# EAGLE board PCB power glider v22 (EAGLE 9.7.0)
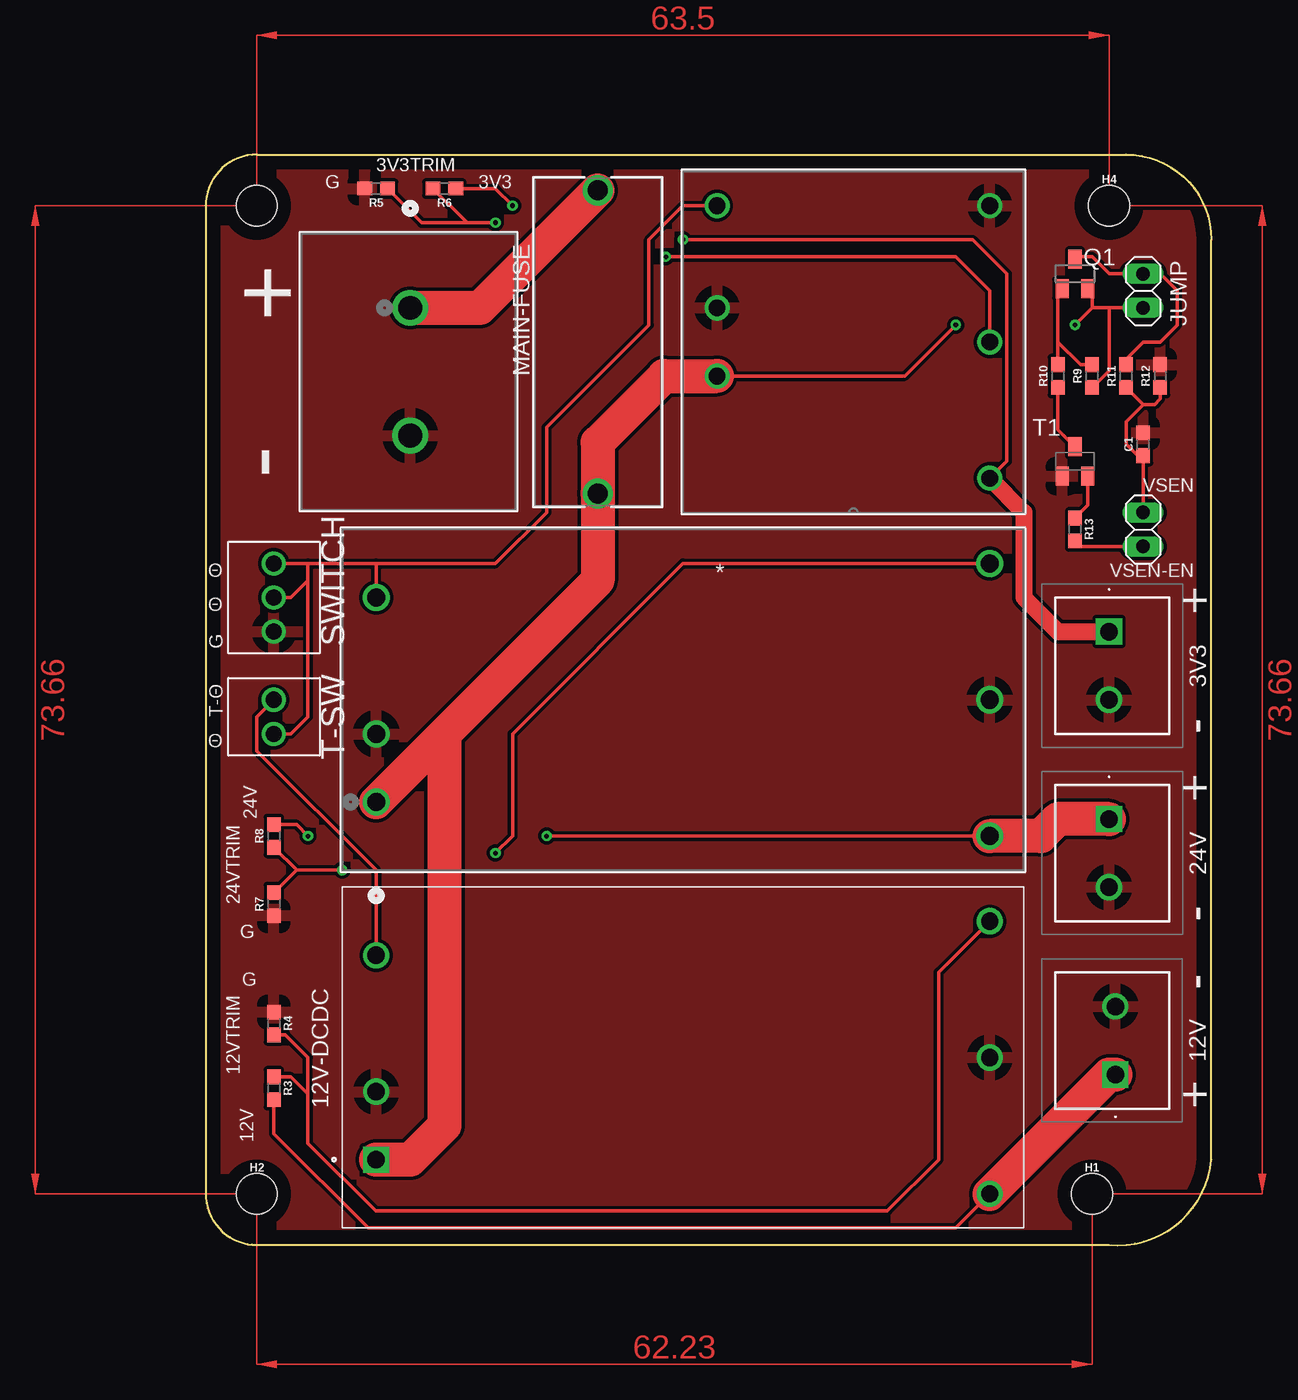
[diagram p0: board, top side]
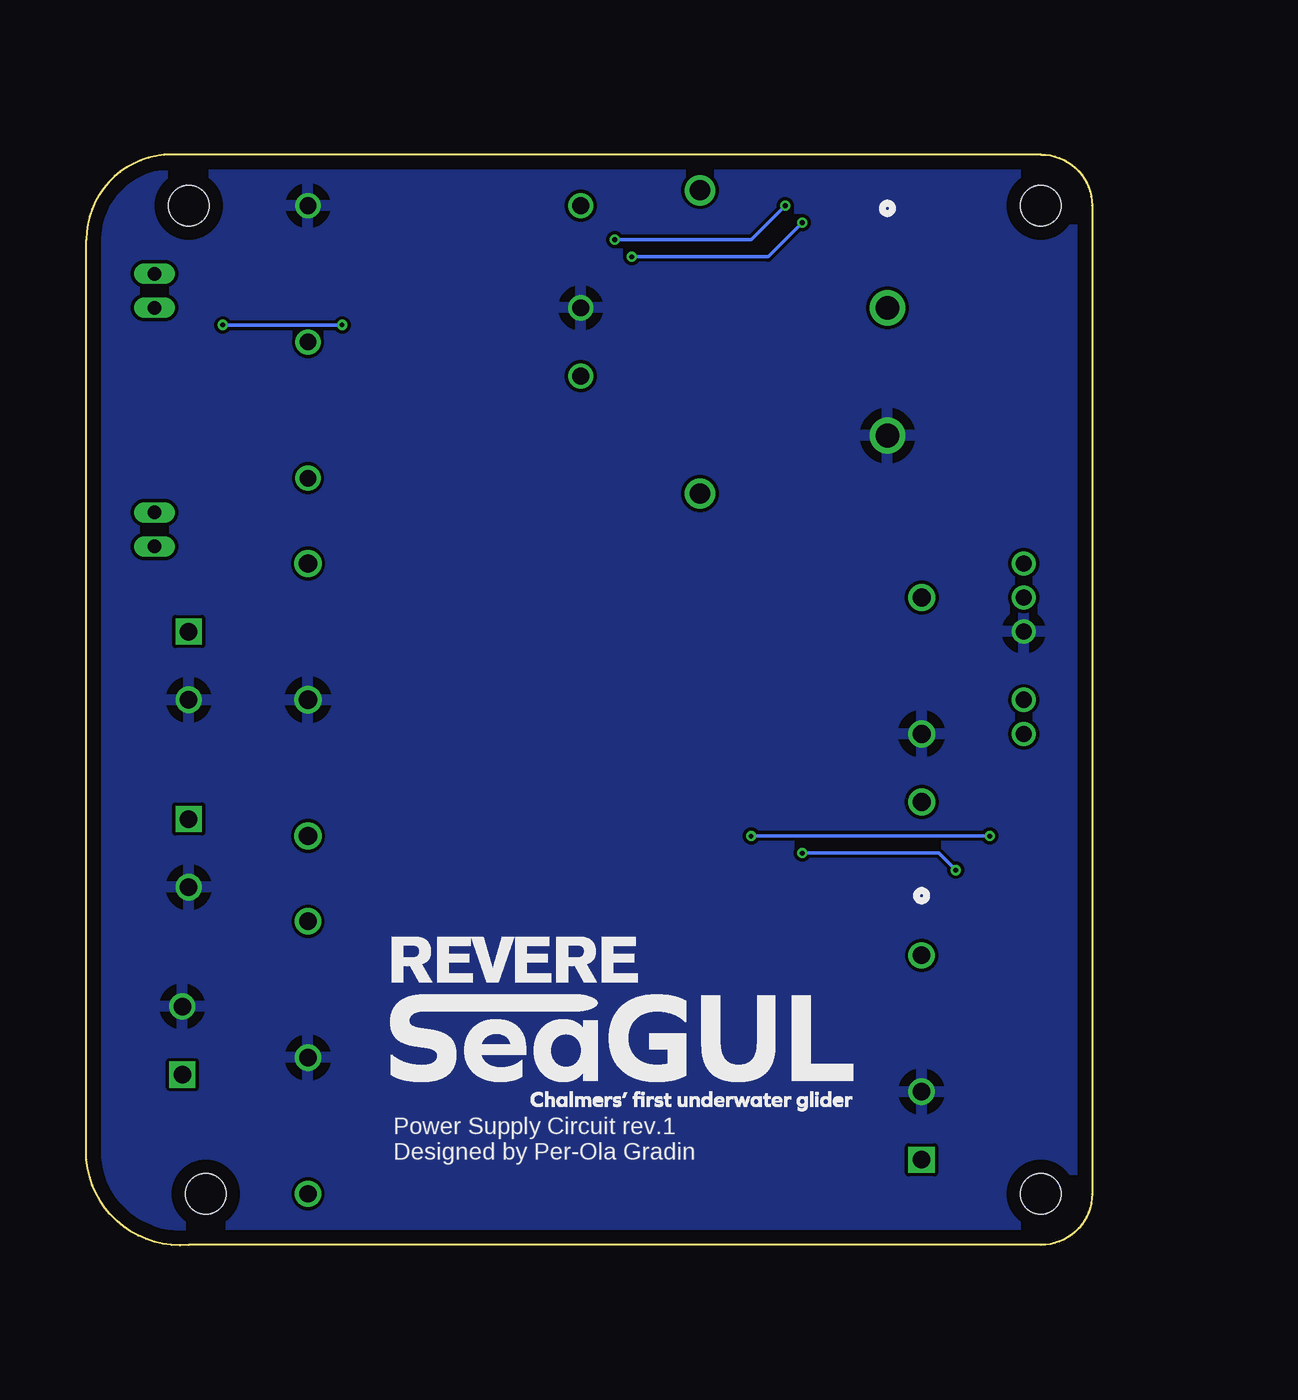
[diagram p1: board, bottom side, seen from below]

Size 74.93 x 81.31 mm. Coordinates in mm from the lower left corner, seen from the top.
Outline: 3.81,0.03 67.31,0.03 arc90 74.93,6.38 74.93,74.96 arc90 68.58,81.31 3.81,81.31 arc90 0,77.5 0,3.84 arc90 3.81,0.03
Copper layers (1*16): Top 0.035mm / dielectric 1.5mm / Bottom 0.035mm
Design rules "default *": minimum track width 6mil, minimum drill 0.35mm, track to track 6mil, track to pad 6mil, pad to pad 6mil, via to via 0.5mm, smd to smd 6mil, copper to edge 40mil, drill to drill 6mil, minimum pad ring 10mil, minimum via ring 8mil, stop-mask expansion 4mil, vias tented up to drill 0mil, thermal gap 0.75mm

## Footprints (pad centres in the part's own frame; a part is rotated, then mirrored left to right if it is on the bottom)
CTBP05082 = drill 1.3 pad 1.95 square: 1 0,0 | drill 1.3 pad 1.95: 2 5.08,0
THN_20WIR_SINGLE_TRP = drill 1.245 pad 1.753: 1 0,0; 2 0,-5.08; 3 0,-12.7; 4 -20.32,7.62; 5 -20.32,-2.54; 6 -20.32,-12.7
CONV_TEN_60-4812WIN = drill 1.3 pad 1.95 square: 1 -22.86,-7.62 | drill 1.3 pad 1.95: 2 -22.86,-2.54; 3 -22.86,7.62; 4 22.86,-10.16; 5 22.86,0; 6 22.86,10.16
TEN_60WIN_TRP = drill 1.346 pad 1.854: 1 0,0; 2 5.08,0; 3 15.24,0; 4 -2.54,-45.72; 5 7.62,-45.72; 6 17.78,-45.72
0603 = smd 1.1 x 1: 1 -0.85,0; 2 0.85,0
STAND-OFF-TIGHT = hole 3.048: 0,0
1X02 = drill 1.016 long: 1 -1.27,0; 2 1.27,0
696108003002 = drill 1.5: 1 -11.3,0; 2 11.3,0
SOT23 = smd 1 x 1.4: 1 -0.95,-1.1; 2 0.95,-1.1; 3 0,1.1
TERMBLK_254-3N = drill 1.2: 1 0,0; 2 2.54,0; 3 5.08,0
SOT23-EBC = smd 1 x 1.4: B 0.95,-1.1; C 0,1.1; E -0.95,-1.1
TERMBLK_254-2N = drill 1.2: 1 0,0; 2 2.54,0
CONN2_1437664-4_TEC = drill 1.778 pad 2.286: 1 0,0; 2 9.525,0

## Placement (x,y rotation side)
3V3  CTBP0508_2  [CTBP05082]  67.31,45.75 270 top
3V3-DCDC  THN_20-4810WIRTHN_20WIR_SINGLE_TRP  [THN_20WIR_SINGLE_TRP]  38.1,64.8 180 top
12V  CTBP0508_2  [CTBP05082]  67.78,12.73 90 top
12V-DCDC  TEN_60-4812WIN  [CONV_TEN_60-4812WIN]  35.56,14 0 top
24V  CTBP0508_2  [CTBP05082]  67.31,31.78 270 top
24V-DCDC  TEN_60-4815WINTEN_60WIN_TRP  [TEN_60WIN_TRP]  12.7,33.05 90 top
C1  100nF  [0603]  69.85,59.72 90 top
H1  STAND-OFFTIGHT  [STAND-OFF-TIGHT]  66.04,3.84 0 top
H2  STAND-OFFTIGHT  [STAND-OFF-TIGHT]  3.81,3.84 0 top
H3  STAND-OFFTIGHT  [STAND-OFF-TIGHT]  3.81,77.5 0 top
H4  STAND-OFFTIGHT  [STAND-OFF-TIGHT]  67.31,77.5 0 top
JUMP  PINHD-1X2  [1X02]  69.85,71.15 90 top
MAIN-FUSE  696108003002  [696108003002]  29.21,67.34 90 top
Q1  PMOSFET  [SOT23]  64.77,72.42 0 top
R3  [0603]  5.08,11.7 270 top
R4  [0603]  5.08,16.54 270 top
R5  [0603]  12.7,78.77 180 top
R6  [0603]  17.78,78.77 180 top
R7  [0603]  5.08,25.43 90 top
R8  [0603]  5.08,30.51 270 top
R9  15kOhm  [0603]  66.04,64.8 270 top
R10  36kOhm  [0603]  63.5,64.8 90 top
R11  110kOhm  [0603]  68.58,64.8 90 top
R12  10kOhm  [0603]  71.12,64.8 270 top
R13  10kOhm  [0603]  64.77,53.37 270 top
SWITCH  2828XX-3282834-3  [TERMBLK_254-3N]  5.08,50.83 270 top
T1  [SOT23-EBC]  64.77,58.45 0 top
T-SW  2828XX-2282834-2  [TERMBLK_254-2N]  5.08,40.67 270 top
VBAT  NC6-P107-02CONN2_1437664-4_TEC  [CONN2_1437664-4_TEC]  15.24,69.88 270 top
VSEN  PINHD-1X2  [1X02]  69.85,53.37 90 top

## Library data of the parts
3V3 12V 24V = CTBP0508_2; DESCRIPTION: Conn Terminal Block F 2 POS 5.08mm Solder ST Thru-Hole 8A; HEIGHT: 10.2mm; MANUFACTURER_NAME: CAMDENBOSS; MANUFACTURER_PART_NUMBER: CTBP0508/2
3V3-DCDC = TRACO_THN 20-4810WIR_Library; COPYRIGHT: Copyright (C) 2024 Ultra Librarian. All rights reserved.; MANUFACTURER_PART_NUMBER: THN 20-4810WIR; MFR_NAME: Traco Power
12V-DCDC = TEN_60-4812WIN; AVAILABILITY: In Stock; CHECK_PRICES: https://www.snapeda.com/parts/TEN%2060-4812WIN/Traco+Power/view-part/?ref=eda; DESCRIPTION: 60 Watt DC/DC converter, industrial, 4:1 input, encapsulated, 2 x 1 metal package; MF: Traco Power; MP: TEN 60-4812WIN; PACKAGE: 2&quot; X 1&quot; Traco Power; PRICE: None; PURCHASE-URL: https://www.snapeda.com/api/url_track_click_mouser/?unipart_id=2783815&manufacturer=Traco Power&part_name=TEN 60-4812WIN&search_term=ten 60-4812win; SNAPEDA_LINK: https://www.snapeda.com/parts/TEN%2060-4812WIN/Traco+Power/view-part/?ref=snap
24V-DCDC = TRACO_TEN-60-4815WIN_Library; COPYRIGHT: Copyright (C) 2024 Ultra Librarian. All rights reserved.; MANUFACTURER_PART_NUMBER: TEN 60-4815WIN; MFR_NAME: Traco Power
C1 = SparkFun-Capacitors
H1-H4 = SparkFun-Hardware
JUMP VSEN = Connector; CATEGORY: Headers; DESCRIPTION: Header, Straight, 2 Position; MANUFACTURER: Generic; MPN: Generic; OPERATING_TEMPERATURE: Generic; PART_STATUS: Active; PITCH: 0.100" (2.54mm); ROHS_COMPLIANCE: Generic; SERIES: Generic; SUB-CATEGORY: Headers, Male Pins; TYPE: Board to Board or Cable, Unshrouded, Through Hole, Straight
MAIN-FUSE = Wurth_Connectors_WR-FSH; DATASHEET-URL: https://www.we-online.com/catalog/datasheet/696108003002.pdf; IR-UL: 20A; IR-VDE: 6.3A; MATES: 696122003001; PART-NUMBER: 696108003002
Q1 = Transistor; CATEGORY: Transistor; SUB-CATEGORY: MOSFET; TYPE: P-Channel
R3-R13 = SparkFun-Resistors
SWITCH = Connector; CATEGORY: Fixed Terminal Blocks; DESCRIPTION: Fixed Terminal Blocks 3P TERMINAL BLOCK; MANUFACTURER: TE Connectivity AMP Connectors; MPN: 282834-3; OPERATING_TEMPERATURE: -40°C ~ 105°C; PART_STATUS: Active; PITCH: 0.100" (2.54mm); ROHS_COMPLIANCE: RoHS Compliant; SERIES: Buchanan; SUBCATEGORY: Terminal Blocks; TYPE: Through Hole; Screw - Rising Cage Clamp; Side wire entry, Horizontal with Board
T1 = transistor
T-SW = Connector; CATEGORY: Fixed Terminal Blocks; DESCRIPTION: Fixed Terminal Blocks 2P SIDE ENTRY 2.54mm; MANUFACTURER: TE Connectivity AMP Connectors; MPN: 282834-2; OPERATING_TEMPERATURE: -40°C ~ 105°C; PART_STATUS: Active; PITCH: 0.100" (2.54mm); ROHS_COMPLIANCE: RoHS Compliant; SERIES: Buchanan; SUBCATEGORY: Terminal Blocks; TYPE: Through Hole; Screw - Rising Cage Clamp; Side wire entry, Horizontal with Board
VBAT = 2pos_barrierstrip_Library; COPYRIGHT: Copyright (C) 2024 Ultra Librarian. All rights reserved.; MANUFACTURER_PART_NUMBER: NC6-P107-02; MFR_NAME: TE Connectivity

## Nets
3.3V: 3V3-DCDC.4 3V3.1 R6.1
3V3TRIM: 3V3-DCDC.5 R5.1 R6.2
12V: 12V-DCDC.4 12V.1 R3.2
12VTRIM: 12V-DCDC.6 R3.1 R4.2
24VTRIM: 24V-DCDC.6 R7.2 R8.2
+24V: 24V-DCDC.4 24V.1 R8.1
DRAIN: JUMP.2 Q1.3 R11.2
GATE: Q1.1 R9.1 R10.2
GND [New Class]: 3V3-DCDC.2 3V3-DCDC.6 3V3.2 12V-DCDC.2 12V-DCDC.5 12V.2 24V-DCDC.2 24V-DCDC.5 24V.2 C1.2 R4.1 R5.2 R7.1 R12.1 SWITCH.3 T1.E VBAT.2
N$3: MAIN-FUSE.2 VBAT.1
N$11: R10.1 T1.C
N$12: R13.1 T1.B
ON/OFF: 3V3-DCDC.3 24V-DCDC.3 SWITCH.1 SWITCH.2 T-SW.2
THRUSTER-ON/OFF: 12V-DCDC.3 T-SW.1
VBAT: 3V3-DCDC.1 12V-DCDC.1 24V-DCDC.1 JUMP.1 MAIN-FUSE.1 Q1.2 R9.2
VSEN: C1.1 R11.1 R12.2 VSEN.2
VSEN-EN: R13.2 VSEN.1

## Tracks (layer width: path | path; a pad name or v marks a point on that pad's centre or on a via)
3.3V  (via drill 0.35)
  Top 0.254: R6.1 21.59,78.77 v22.86,77.5 | v35.56,74.96 57.15,74.96 59.69,72.42 59.69,58.45 3V3-DCDC.4
  Top 1.27: 3V3-DCDC.4 60.96,54.64 60.96,48.29 63.5,45.75 3V3.1
  Bottom 0.254: v22.86,77.5 25.4,74.96 v35.56,74.96
3V3TRIM  (via drill 0.35)
  Top 0.254: R5.1 16.09,76.23 19.47,76.23 | R6.2 19.47,76.23 | 19.47,76.23 v21.59,76.23 | v34.29,73.69 55.88,73.69 58.42,71.15 3V3-DCDC.5
  Bottom 0.254: v21.59,76.23 24.13,73.69 v34.29,73.69
12V
  Top 0.254: R3.2 5.08,8.31 12.1,1.3 55.88,1.3 12V-DCDC.4
  Top 2.54: 12V-DCDC.4 67.31,12.73 12V.1
12VTRIM
  Top 0.254: R4.2 5.93,15.69 7.62,14 7.62,11.28 | 7.62,11.28 6.35,12.55 R3.1 | 12V-DCDC.6 54.61,20.35 54.61,6.38 50.8,2.57 12.67,2.57 7.62,7.62 7.62,11.28
24VTRIM  (via drill 0.35)
  Top 0.254: R7.2 6.77,27.97 | R8.2 6.77,27.97 | 6.77,27.97 v10.16,27.97 | v21.59,29.24 22.86,30.51 22.86,38.13 35.56,50.83 24V-DCDC.6
  Bottom 0.254: v10.16,27.97 11.43,29.24 v21.59,29.24
+24V  (via drill 0.35)
  Top 0.254: R8.1 6.77,31.36 v7.62,30.51 | v25.4,30.51 24V-DCDC.4
  Top 2.54: 24V-DCDC.4 62.23,30.51 63.5,31.78 24V.1
  Bottom 0.254: v7.62,30.51 v25.4,30.51
DRAIN
  Top 0.254: R11.2 68.58,66.07 69.85,67.34 71.12,67.34 72.39,68.61 72.39,71.15 71.12,72.42 JUMP.2 67.31,72.42 66.04,73.69 64.94,73.69 Q1.3
GATE
  Top 0.254: Q1.1 63.5,71 63.5,67.34 | 63.5,67.34 R10.2 | 63.5,67.34 65.19,65.65 R9.1
GND
  pour Top (isolate 0.254): 67.37,0.43 68.09,0.41 68.83,0.47 69.55,0.61 70.26,0.83 70.94,1.12 71.58,1.5 72.17,1.94 72.72,2.44 73.2,3.01 73.61,3.62 73.96,4.28 74.23,4.97 74.42,5.68 74.52,6.41 74.52,74.95 74.48,75.68 74.35,76.38 74.14,77.07 73.84,77.72 73.47,78.33 73.03,78.9 72.52,79.41 71.96,79.85 71.34,80.22 70.69,80.52 70,80.73 69.3,80.86 68.57,80.9 3.82,80.9 3.33,80.87 2.85,80.76 2.4,80.59 1.97,80.36 1.58,80.07 1.24,79.73 0.95,79.34 0.71,78.91 0.55,78.46 0.44,77.98 0.41,77.48 0.41,3.85 0.44,3.35 0.55,2.88 0.71,2.43 0.95,2 1.24,1.61 1.58,1.27 1.97,0.98 2.4,0.74 2.85,0.57 3.33,0.47 3.82,0.44 67.26,0.44 67.27,0.44 67.32,0.44 67.36,0.44
  pour Bottom (isolate 0.254): 67.37,0.43 68.09,0.41 68.83,0.47 69.55,0.61 70.26,0.83 70.94,1.12 71.58,1.5 72.17,1.94 72.72,2.44 73.2,3.01 73.61,3.62 73.96,4.28 74.23,4.97 74.42,5.68 74.52,6.41 74.52,74.95 74.48,75.68 74.35,76.38 74.14,77.07 73.84,77.72 73.47,78.33 73.03,78.9 72.52,79.41 71.96,79.85 71.34,80.22 70.69,80.52 70,80.73 69.3,80.86 68.57,80.9 3.82,80.9 3.33,80.87 2.85,80.76 2.4,80.59 1.97,80.36 1.58,80.07 1.24,79.73 0.95,79.34 0.71,78.91 0.55,78.46 0.44,77.98 0.41,77.48 0.41,3.85 0.44,3.35 0.55,2.88 0.71,2.43 0.95,2 1.24,1.61 1.58,1.27 1.97,0.98 2.4,0.74 2.85,0.57 3.33,0.47 3.82,0.44 67.26,0.44 67.27,0.44 67.32,0.44 67.36,0.44
N$3
  Top 2.54: VBAT.1 20.45,69.88 MAIN-FUSE.2
N$11
  Top 0.254: R10.1 63.5,60.82 T1.C
N$12
  Top 0.254: R13.1 65.72,55.17 T1.B
ON/OFF
  Top 0.254: 3V3-DCDC.3 35.56,77.5 33.02,74.96 33.02,68.61 25.4,60.99 25.4,54.64 21.59,50.83 12.7,50.83 | 7.62,50.83 12.7,50.83 | SWITCH.1 7.62,50.83 | 7.62,50.83 7.62,49.56 | 7.62,49.56 7.62,39.4 6.35,38.13 T-SW.2 | 7.62,49.56 6.35,48.29 SWITCH.2 | 24V-DCDC.3 12.7,50.83
THRUSTER-ON/OFF
  Top 0.254: T-SW.1 3.81,39.4 3.81,36.86 12.7,27.97 12V-DCDC.3
VBAT  (via drill 0.35)
  Top 0.254: 3V3-DCDC.1 52.07,64.8 v55.88,68.61 | R9.2 67.31,65.22 67.31,69.88 | JUMP.1 67.31,69.88 | v64.77,68.61 66.04,69.88 | 66.04,69.88 67.31,69.88 | 66.04,69.88 66.04,71 Q1.2
  Top 2.54: 17.78,38.13 29.21,49.56 MAIN-FUSE.1 29.21,59.85 34.16,64.8 3V3-DCDC.1 | 12V-DCDC.1 15.24,6.38 17.78,8.92 17.78,38.13 | 24V-DCDC.1 17.78,38.13
  Bottom 0.254: v64.77,68.61 v55.88,68.61
VSEN
  Top 0.254: VSEN.2 C1.1 69.43,58.87 68.58,59.72 68.58,61.41 69.85,62.68 | 69.85,62.68 70.7,62.68 71.12,63.1 R12.2 | 69.85,62.68 R11.1
VSEN-EN
  Top 0.254: R13.2 65.19,52.1 VSEN.1
(copper drawn outside any net)
  shapes: Top area x4

## Text on the board
tNames: 3V3TRIM | G | 3V3 | + | - | VSEN | Θ | VSEN-EN | Θ | + | G | T-Θ | Θ | - | + | 24V | 24VTRIM | - | G | G | - | 12VTRIM | 12V | +
bNames: Power Supply Circuit rev.1 / Designed by Per-Ola Gradin